# EAGLE board Sensor_Aparcamiento (EAGLE 9.3.0)
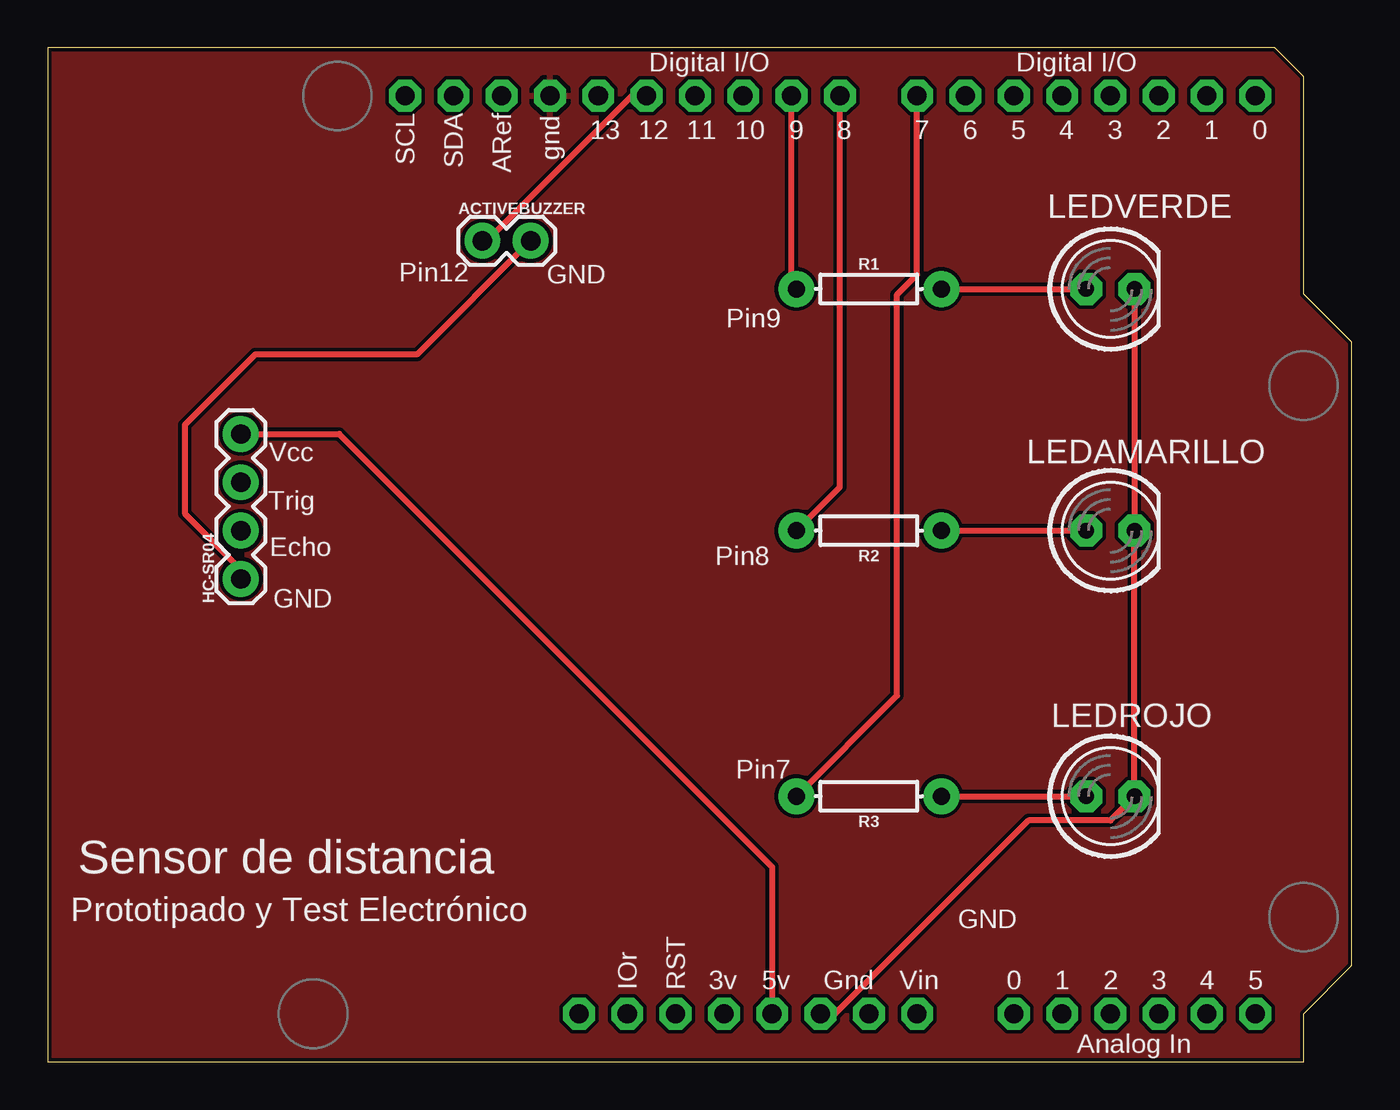
[diagram p0: board, top side]
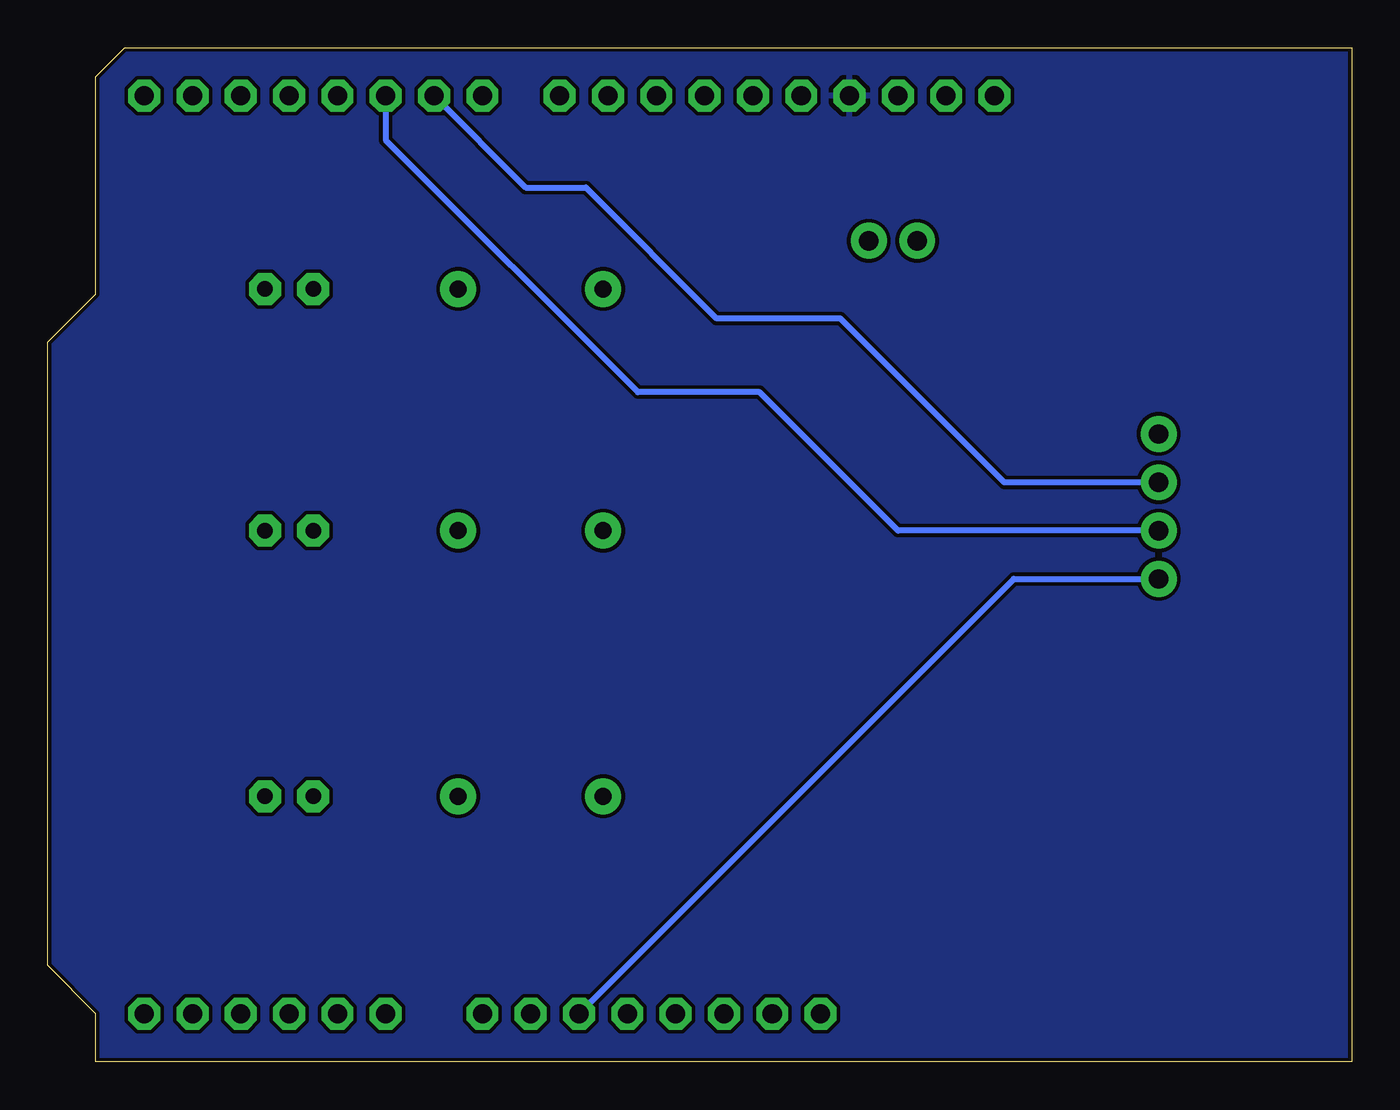
[diagram p1: board, bottom side, seen from below]

Size 68.58 x 53.34 mm. Coordinates in mm from the lower left corner, seen from the top.
Outline: 0,0 66.04,0 66.04,2.54 68.58,5.08 68.58,37.85 68.56,37.86 68.55,37.87 66.05,40.38 66.04,51.82 64.52,53.34 0,53.34 0,0
Copper layers (1*16): Top 0.035mm / dielectric 1.5mm / Bottom 0.035mm
Design rules "SparkFun": minimum track width 8mil, minimum drill 20mil, track to track 8mil, track to pad 8mil, pad to pad 8mil, via to via 8mil, smd to smd 8mil, copper to edge 8mil, drill to drill 8mil, minimum pad ring 12mil, minimum via ring 10mil, stop-mask expansion 4mil, vias tented up to drill 20mil, thermal gap 10mil

## Footprints (pad centres in the part's own frame; a part is rotated, then mirrored left to right if it is on the bottom)
1X02 = drill 1.016 pad 1.88: 1 0,0; 2 2.54,0
1X04 = drill 1.016 pad 1.88: 1 0,0; 2 2.54,0; 3 5.08,0; 4 7.62,0
LED5MM = drill 0.813 pad 1.676 octagon: A -1.27,0; K 1.27,0
AXIAL-0.3 = drill 0.9 pad 1.88: P$1 -3.81,0; P$2 3.81,0
ARDUINOR3-BPLACE = drill 1 pad 1.676 octagon: 3V 35.56,2.54; 5V 38.1,2.54; A0 50.8,2.54; A1 53.34,2.54; A2 55.88,2.54; A3 58.42,2.54; A4 60.96,2.54; A5 63.5,2.54; AREF 23.876,50.8; D0 63.5,50.8; D1 60.96,50.8; D2 58.42,50.8; D3 55.88,50.8; D4 53.34,50.8; D5 50.8,50.8; D6 48.26,50.8; D7 45.72,50.8; D8 41.656,50.8; D9 39.116,50.8; D10 36.576,50.8; D11 34.036,50.8; D12 31.496,50.8; D13 28.956,50.8; GND 26.416,50.8; GND1 43.18,2.54; GND2 40.64,2.54; IOREF 30.48,2.54; RESERVED 27.94,2.54; RESET 33.02,2.54; SCL 18.796,50.8; SDA 21.336,50.8; VIN 45.72,2.54

## Placement (x,y rotation side)
ACTIVEBUZZER  [1X02]  22.86,43.18 0 top
HC-SR04  [1X04]  10.16,25.4 90 top
LEDAMARILLO  [LED5MM]  55.88,27.94 0 top
LEDROJO  [LED5MM]  55.88,13.97 0 top
LEDVERDE  [LED5MM]  55.88,40.64 0 top
R1  220  [AXIAL-0.3]  43.18,40.64 0 top
R2  220  [AXIAL-0.3]  43.18,27.94 180 top
R3  220  [AXIAL-0.3]  43.18,13.97 180 top
U1  ARDUINOR3-BPLACE  [ARDUINOR3-BPLACE]  0,0 0 top

## Library data of the parts
ACTIVEBUZZER = SparkFun-Connectors
HC-SR04 = SparkFun-Connectors; PROD_ID: CONN-09696
LEDAMARILLO LEDROJO LEDVERDE U1 = adafruit
R1-R3 = SparkFun-Resistors; PROD_ID: RES-12182

## Nets
3V: U1.3V
GND: U1.GND
GND1: U1.GND1
N$1: HC-SR04.2 U1.D5
N$2: ACTIVEBUZZER.2 HC-SR04.1 LEDAMARILLO.K LEDROJO.K LEDVERDE.K U1.GND2
N$3: HC-SR04.3 U1.D6
N$4: HC-SR04.4 U1.5V
N$5: R3.P$2 U1.D7
N$6: R2.P$2 U1.D8
N$7: R1.P$1 U1.D9
N$8: LEDVERDE.A R1.P$2
N$9: LEDAMARILLO.A R2.P$1
N$10: LEDROJO.A R3.P$1
N$12: ACTIVEBUZZER.1 U1.D12
VIN: U1.VIN

## Tracks (layer width: path | path; a pad name or v marks a point on that pad's centre or on a via)
GND
  pour Bottom: 0.1,53.4 0.1,-0.1 70.6,-0.1 70.9,0.2 70.9,53 70.8,53.1 0.4,53.1
  pour Top: -0.3,53.7 -0.3,-0.4 0.6,-1.3 70.4,-1.3 71.9,0.2 71.9,53.2 71.1,54 0,54
N$1
  Bottom 0.305: U1.D5 50.8,48.48 37.54,35.22 31.14,35.22 23.86,27.94 HC-SR04.2
N$2
  Top 0.305: ACTIVEBUZZER.2 19.42,37.2 10.93,37.2 7.22,33.49 7.22,28.85 10.16,25.91 HC-SR04.1 | LEDVERDE.K LEDAMARILLO.K LEDROJO.K 55.88,12.7 51.56,12.7 41.4,2.54 U1.GND2
  Bottom 0.305: HC-SR04.1 17.78,25.4 U1.GND2
N$3
  Bottom 0.305: U1.D6 43.44,45.98 40.28,45.98 33.4,39.1 26.89,39.1 18.27,30.48 HC-SR04.3
N$4
  Top 0.305: U1.5V 38.1,10.25 15.33,33.02 HC-SR04.4
N$5
  Top 0.305: U1.D7 45.72,41.4 44.67,40.35 44.67,19.27 R3.P$2
N$6
  Top 0.305: U1.D8 41.66,30.23 R2.P$2
N$7
  Top 0.305: U1.D9 39.12,40.89 R1.P$1
N$8
  Top 0.305: R1.P$2 LEDVERDE.A
N$9
  Top 0.305: R2.P$1 LEDAMARILLO.A
N$10
  Top 0.305: R3.P$1 LEDROJO.A
N$12
  Top 0.305: U1.D12 30.73,50.8 23.11,43.18 ACTIVEBUZZER.1

## Text on the board
tPlace: Pin12 | GND | Pin9 | Vcc | Trig | Echo | Pin8 | GND | Pin7 | Sensor de distancia | Prototipado y Test Electrónico | GND